# Altium PCB PCB.PcbDoc
Units mil, origin at the board's own origin, x right, y up, seen from the top; angles counter-clockwise.
Board outline 7940 x 2960 mil, 2 copper layers (Top Layer, Bottom Layer); 79 components, 65 nets, 256 pads, 2 vias.
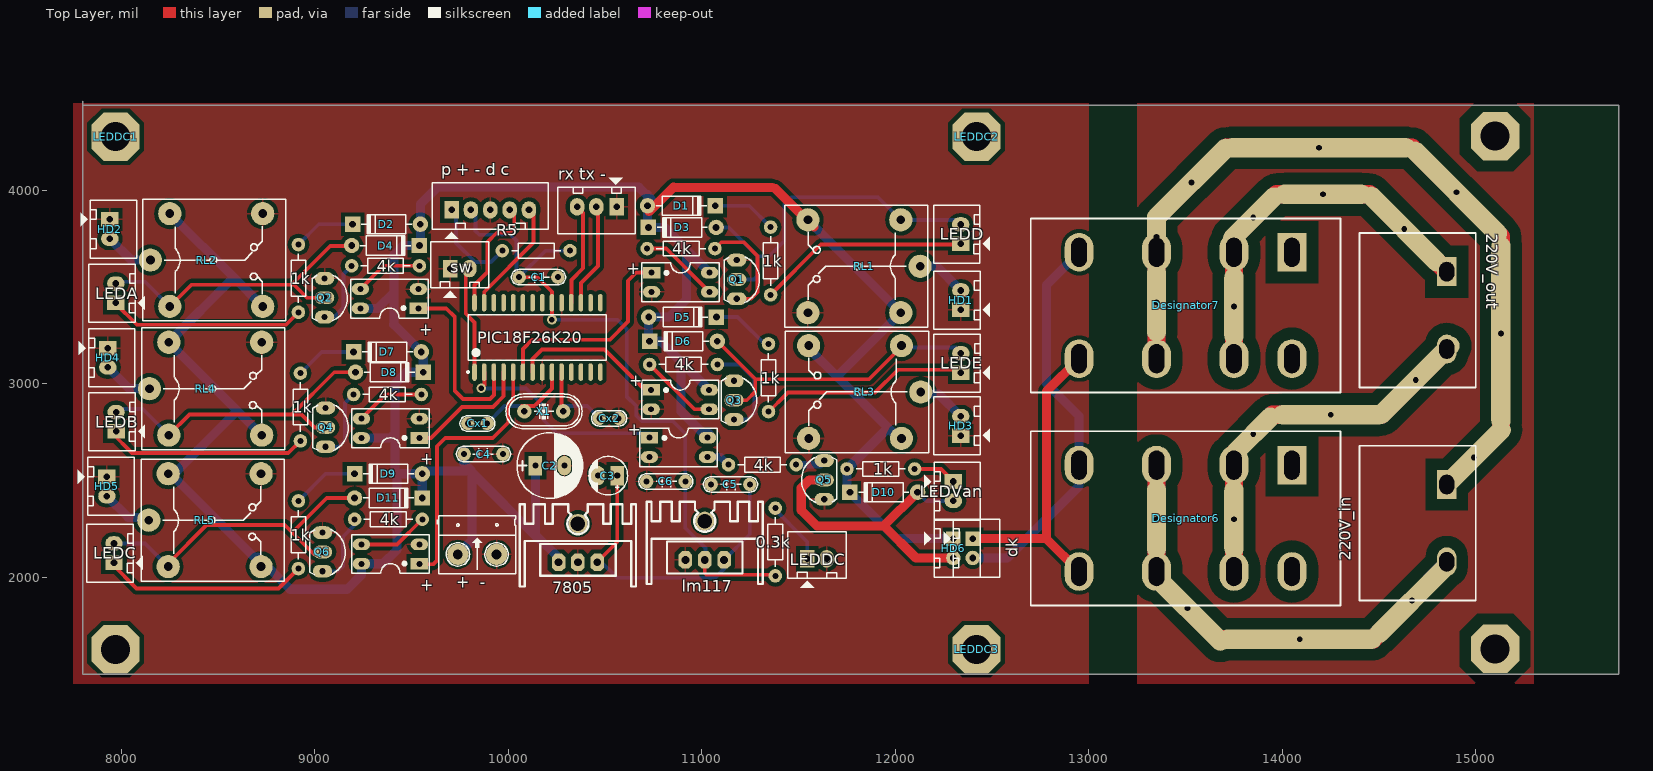
[diagram p0: Top Layer view]
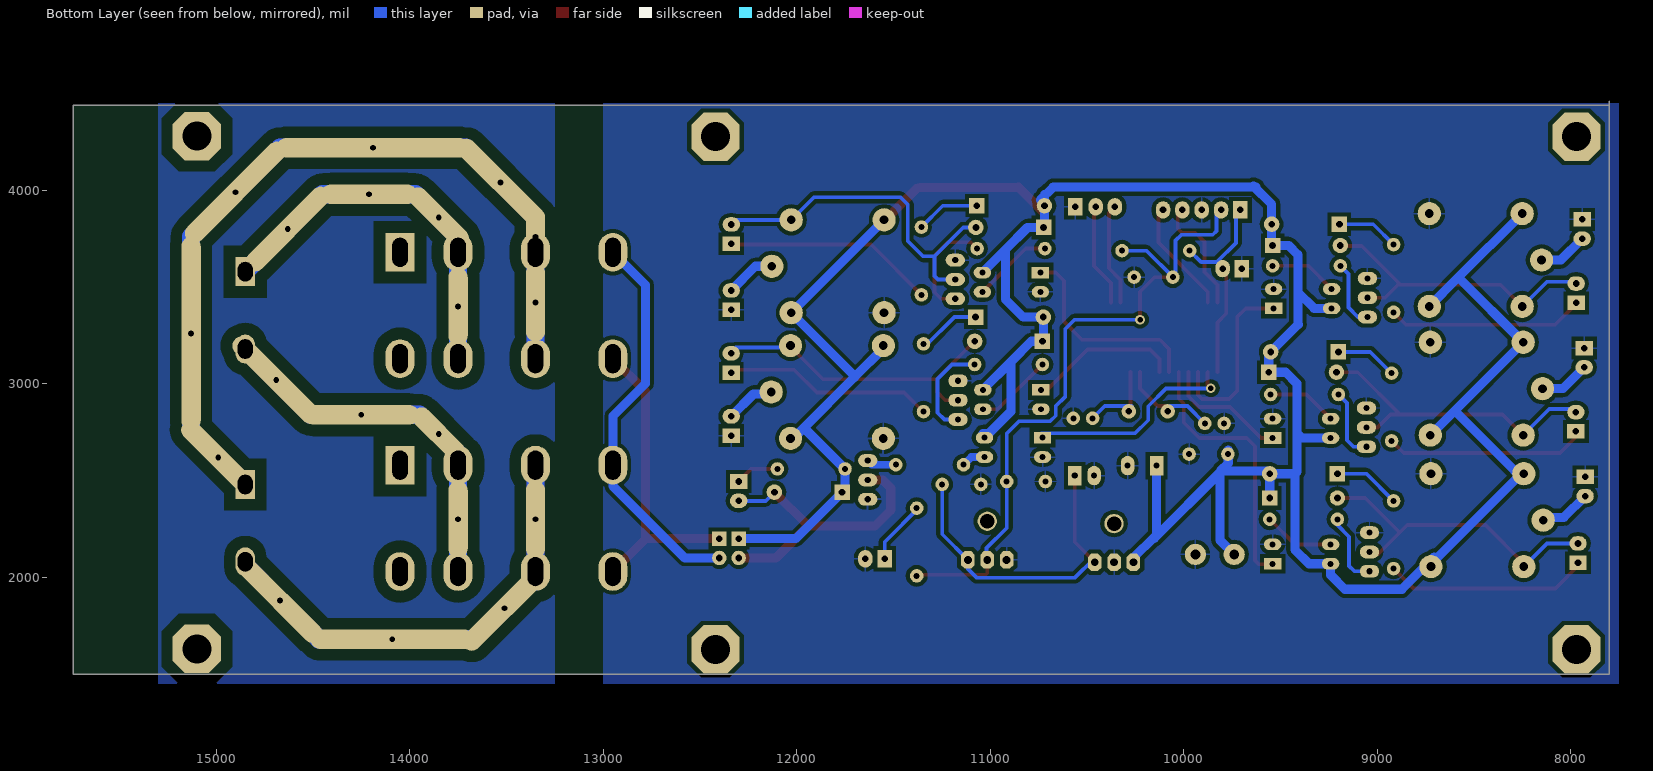
[diagram p1: Bottom Layer view, seen from below]
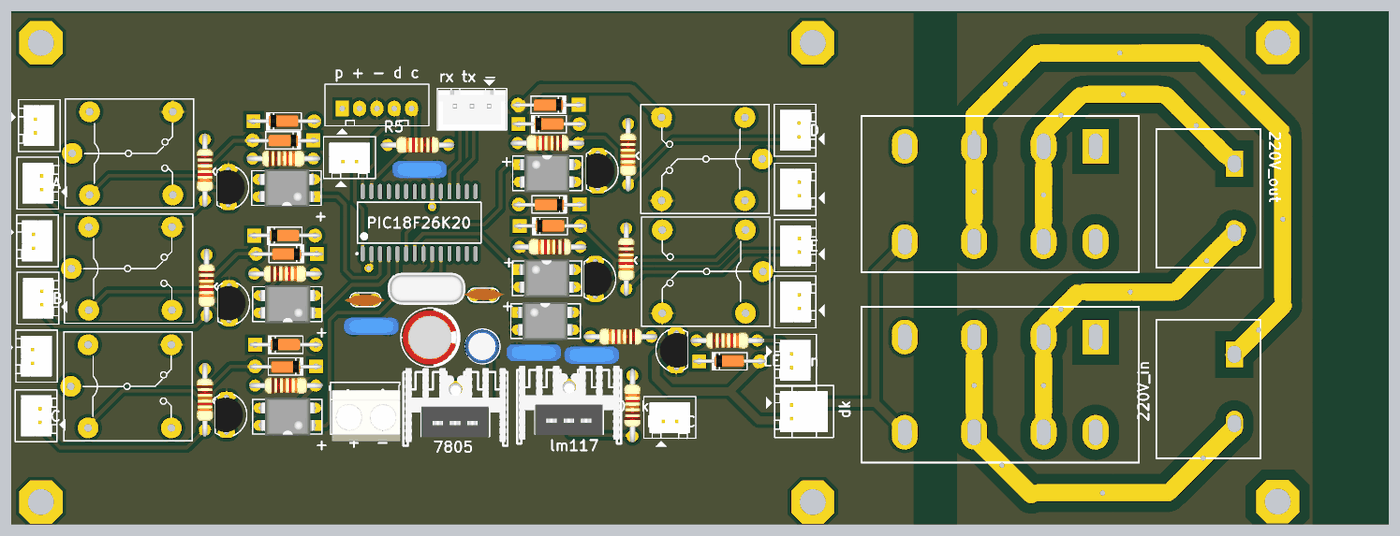
[diagram p2: 3D render of the assembled board from above, using the file's embedded part models]

## Layer stack, top to bottom
Top Layer: signal copper 1.4
Dielectric: dielectric 12.6, FR-4, Dk 4.8
Bottom Layer: signal copper 1.4

## Board outline
7800,4460 7800,1500 15740,1500 15740,4440 7800,4440

## Design rules (kind name [scope] priority, off if disabled: settings)
Clearance [All] p1: gap=60
PolygonConnect [All] p1: connectstyle=Relief reliefconductorwidth=10 reliefentries=4 polygonreliefangle="90 Angle"
RoutingVias [All] p1: holewidth=28 width=50 viastyle="Through Hole" minholewidth=28 minwidth=50 maxholewidth=28 maxwidth=50
SilkscreenOverComponentPads [All] p1: minsilkscreentomaskgap=10
SolderMaskExpansion [All] p1: expansion=4
Width 220V [(InNet('24') OR InNet('25') OR InNet('26') OR InNet('27') OR InNet('28') OR InNet('29') OR InNet('30') OR InNet('31') OR InNet('32'))] p1: maxlimit=94 minlimit=94 preferedwidth=94
Width power [(InNet('12V') OR InNet('NetHD1_2') OR InNet('NetHD2_2') OR InNet('NetHD3_2') OR InNet('NetHD4_2') OR InNet('NetHD5_2') OR InNet('33') OR InNet('34'))] p2: maxlimit=47.24 minlimit=47.24 preferedwidth=47.24
Width "all net" [All] p3: maxlimit=59.06 minlimit=19.68 preferedwidth=19.68
27 further rules are at their usual default settings.

## Components (designator, comment, footprint, x,y, rotation, side; value= is the part's Value field where it differs from the comment)
0.3k "1k" R1/4W 11379.53,2357.52 r270 top (schematic designator R14)
1k "1k" R1/4W 11355,3460 r90 top (schematic designator R3)
1k "1k" R1/4W 8915,3370 r90 top (schematic designator R4)
1k "1k" R1/4W 11344.33,2856.46 r90 top (schematic designator R8)
1k "1k" R1/4W 8925,2705 r90 top (schematic designator R9)
1k "1k" R1/4W 12100,2560 r180 top (schematic designator R12)
1k "1k" R1/4W 8915,2045 r90 top (schematic designator R13)
4k "4.7k" R1/4W 10717.36,3698.98 r0 top (schematic designator R1)
4k "4.7k" R1/4W 9540,3610 r180 top (schematic designator R2)
4k "4.7k" R1/4W 10730,3100 r0 top (schematic designator R6)
4k "4.7k" R1/4W 9550,2945 r180 top (schematic designator R7)
4k "4.7k" R1/4W 11137.64,2581.85 r0 top (schematic designator R10)
4k "4.7k" R1/4W 9555,2300 r180 top (schematic designator R11)
220V_in "Comment" connec2 14850,2480 r270 top
220V_out "Comment" connec2 14850,3580 r270 top
7805 "7805" QTO-220H3 10259.53,2077.52 r0 top (schematic designator J2)
+ "PC817" DIP4/W0.3 10740,3574.96 r270 top (schematic designator U1)
+ "PC817" DIP4/W0.3 9535,3390 r90 top (schematic designator U2)
+ "PC817" DIP4/W0.3 10738.03,2968.66 r270 top (schematic designator U4)
+ "PC817" DIP4/W0.3 9540,2720 r90 top (schematic designator U5)
+ "PC817" DIP4/W0.3 10729.17,2721.61 r270 top (schematic designator U6)
+ "PC817" DIP4/W0.3 9540,2070 r90 top (schematic designator U7)
"+  -" "Jac DC" HED2 9739.02,2118.27 r0 top (schematic designator JDC1)
C1 "104" CN2 10255.75,3551.34 r180 top
C2 "100uF/35V" CP1.5/3.4 10139.53,2577.52 r0 top
C3 "10uF" CP1/2 10562.83,2525.75 r180 top
C4 "104" CN2 9771.5,2636.97 r0 top
C5 "104" CN2 11247.87,2480.47 r180 top
C6 "104" CN2 10914.21,2495.24 r180 top
Cx1 "33pF" CN1 9890.59,2795.43 r180 top
Cx2 "33pF" CN1 10470.32,2822.01 r0 top
D1 "1N4007" D1A 10719.33,3920.43 r180 top
D2 "1N4007" D1A 9545,3825 r0 top
D3 "1N4007" D1A 11073.66,3808.23 r0 top
D4 "1N4007" D1A 9190,3715 r180 top
D5 "1N4007" D1A 10725,3345 r180 top
D6 "1N4007" D1A 11080,3220 r0 top
D7 "1N4007" D1A 9550,3165 r0 top
D8 "1N4007" D1A 9210,3060 r180 top
D9 "1N4007" D1A 9555,2535 r0 top
D10 "1N4007" D1A 12115,2440 r0 top
D11 "1N4007" D1A 9205,2410 r180 top
Designator6 "Comment" DIP8 14050,2580 r270 top
Designator7 "Comment" DIP8 14050,3680 r270 top
dk "Comment" CON2#1 12400,2200 r270 top
HD1 "Header 2" CON2#2 12338.11,3382.56 r90 top
HD2 "Header 2" CON2#2 7940,3850 r270 top
HD3 "Header 2" CON2#2 12338.11,2732.56 r90 top
HD4 "Header 2" CON2#2 7930,3185 r270 top
HD5 "Header 2" CON2#2 7925,2520 r270 top
HD6 "Header 2" CON2#1 12300,2200 r270 top
LEDA "LED" CON2#2 7971.3,3418.46 r90 top (schematic designator LED2)
LEDB "LED" CON2#2 7972.28,2754.09 r90 top (schematic designator LED4)
LEDC "LED" CON2#2 7961.46,2074.96 r90 top (schematic designator LED6)
LEDD "LED" CON2#2 12337.44,3723.58 r90 top (schematic designator LED1)
LEDDC "LED" CON2#2 11545.12,2095.63 r0 top (schematic designator LED7)
LEDDC1 "LED" VIT 7969.53,4277.52 r0 top (schematic designator LED7)
LEDDC2 "LED" VIT 12419.53,4277.52 r0 top (schematic designator LED7)
LEDDC3 "LED" VIT 12419.53,1627.52 r0 top (schematic designator LED7)
LEDE "LED" CON2#2 12338.43,3057.24 r90 top (schematic designator LED3)
LEDVan "LED" CON2#2 12300.04,2495.24 r270 top (schematic designator LED5)
lm117 "LM117" QTO-220H3 10915,2090 r0 top (schematic designator J3)
"p + - d c" "ICSD" CON5 9706.54,3898.78 r0 top (schematic designator *1)
PIC18F26K20 "PIC18F26K20-I/SO" SOIC-SO28_N 10150,3240 r90 top (schematic designator U3)
Q1 "C1815" QTO-92 11179.96,3539.53 r270 top
Q2 "C1815" QTO-92 9050,3445 r270 top
Q3 "C1815" QTO-92 11166.18,2915.51 r270 top
Q4 "C1815" QTO-92 9055,2775 r270 top
Q5 "C1815" QTO-92 11632.72,2503.11 r90 top
Q6 "C1815" QTO-92 9039.21,2131.06 r270 top
R5 "1k" R1/4W 9968.35,3688.15 r0 top
RL1 "Relay 10A/12V" RL_SPDT_10A 12128.11,3607.56 r180 top
RL2 "Relay 10A/12V" RL_SPDT_10A 8150,3640 r0 top
RL3 "Relay 10A/12V" RL_SPDT_10A 12131.73,2957.83 r180 top
RL4 "Relay 10A/12V" RL_SPDT_10A 8145,2975 r0 top
RL5 "Relay 10A/12V" RL_SPDT_10A 8141.57,2295.43 r0 top
"rx tx -" "UART" CON3 10555,3915 r180 top (schematic designator J1)
sw "SW" CON2#2 9698.66,3595.63 r0 top (schematic designator SW1)
X1 "4Mhz" XT2 10182.91,2857.52 r180 top

## Footprints (in the part's own frame and the unit in brackets; to place one, negate y for a bottom-side part, rotate by r counter-clockwise, add the part's x,y. Pads: shape width x height; smd on the part's side, far side on the other; paste and mask are expansions set on the pad)
CN1 [mil]
  round 70 hole 31: 1(0,0) 2(100,0)
  silkscreen extent -40,-40 141,40, body extent -60,-30 170,37, height 265
CN2 [mil]
  round 70 hole 31: 1(0,0) 2(200,0)
  silkscreen extent -40,-40 240,40, body extent -54,-44 260,55, height 407
CON2#1 [mil] "CON2"
  rect 75x75 hole 34: 1(0,0)
  round 75 hole 34: 2(100,0)
  silkscreen extent -100,-150 200,140, body extent -68,-70 168,107, height 236
CON2#2 [mil] "CON2"
  rect 75x90 hole 34: 1(0,0)
  oval 75x90 hole 34: 2(100,0)
  silkscreen extent -100,-150 200,140, body extent -68,-70 168,107, height 236
CON3 [mil] "CON 3"
  rect 75x90 hole 34: 1(-5,0)
  oval 75x90 hole 34: 2(100,0) 3(200,0)
  silkscreen extent -100,-150 300,140, body extent -95,-90 295,136, height 276
CON5 [mil] "CON5"
  rect 75x90 hole 34: 1(0,0)
  oval 75x90 hole 34: 2(100,0) 3(200,0) 4(300,0) 5(400,0)
  silkscreen extent -100,-150 500,140
connec2 [mil] "connec2"
  rect 150x100 hole 80 slot 100 at 0 deg: 1(0,0)
  oval 150x100 hole 80 slot 100 at 0 deg: 2(400,0)
  silkscreen extent -200,-450 600,150
CP1.5/3.4 [mil] "Tu hoa 220->470uF,16V, 470uF/16V,25V"
  rect 70x100 hole 32: 1(0,0)
  oval 70x100 hole 32: 2(150,0)
  silkscreen extent -95,-170 245,170, body extent -85,-157 230,157, height 446
CP1/2 [mil] "Tu hoa < 22uF/16>50V"
  rect 70x100 hole 32: 1(0,0)
  oval 70x100 hole 32: 2(100,0)
  silkscreen extent -53,-100 147,100, body extent -49,-99 149,99, height 287
D1A [mil] "Diode 1A, W 100mil, L 350mil"
  round 80 hole 35: 1(0,0)
  rect 80x80 hole 35: 2(-350,0)
  silkscreen extent -305,-50 -45,50, body extent -386,-33 34,36, height 84
DIP4/W0.3 [mil] "4 PIN, W 300mil, Pin to pin 100mil"
  rect 60x90 hole 31: 1(0,0)
  oval 60x90 hole 31: 2(100,0) 3(100,300) 4(0,300)
  silkscreen extent -50,-50 150,350, body extent -59,-10 159,305, height 170
DIP8 [mil] "relay 12v"
  rect 200x150 hole 80 slot 150 at 0 deg: 1(0,0)
  oval 200x150 hole 80 slot 150 at 0 deg: 4(550,0) 5(0,-300) 8(550,-300) 9(0,-700) 12(550,-700) 13(0,-1100) 14(550,-1100)
  silkscreen extent -175,-1350 725,250
HED2 [mil] "Header 2, 2 pin, hight 300mil, Pin to Pin 200, Colour Green"
  round 110 hole 50: 1(0,0) 2(200,0)
  silkscreen extent -106,-100 300,200, body extent -92,-140 302,155, height 394
QTO-92 [mil] "TO-92"
  oval 66x100 hole 32: 1(-100,0) 2(0,0) 3(100,0)
  silkscreen extent -117,-65 120,118, body extent -109,-66 109,95, height 245
QTO-220H3 [mil] "TO-220 1-2-3"
  oct 70x90 hole 40: 1(0,0) 2(100,0) 3(200,0)
  round 100 hole 75: 4(100,200)
  silkscreen extent -200,-125 400,300, body extent -190,-102 392,323, height 984
R1/4W [mil] "R 1/4W, 2 Pin, 350mil"
  round 70 hole 31: 1(0,0) 2(350,0)
  silkscreen extent 48,-38 302,38, body extent -40,-47 386,47, height 111
RL_SPDT_10A [mil] "Relay SPDT, 5 pin, 10A,W 650mil, L 800mil, H 800mil"
  round 120 hole 45: 1(0,0) 2(580,240) 3(580,-240) 4(100,-240) 5(100,240)
  silkscreen extent -40,-315 700,315
SOIC-SO28_N [mm] "SOIC, 28-Leads, Body 17.9x7.5mm, Pitch 1.27mm, IPC Medium Density"
  oval 2.3x0.6 smd: 1(-4.55,8.255) 2(-4.55,6.985) 3(-4.55,5.715) 4(-4.55,4.445) 5(-4.55,3.175) 6(-4.55,1.905) 7(-4.55,0.635) 8(-4.55,-0.635) 9(-4.55,-1.905) 10(-4.55,-3.175) 11(-4.55,-4.445) 12(-4.55,-5.715) 13(-4.55,-6.985) 14(-4.55,-8.255) 15(4.55,-8.255) 16(4.55,-6.985) 17(4.55,-5.715) 18(4.55,-4.445) 19(4.55,-3.175) 20(4.55,-1.905) 21(4.55,-0.635) 22(4.55,0.635) 23(4.55,1.905) 24(4.55,3.175) 25(4.55,4.445) 26(4.55,5.715) 27(4.55,6.985) 28(4.55,8.255)
  silkscreen extent -4.67,-9.05 3,9.23, body extent -3.8,-9.06 3.8,9.06, height 2.65
VIT [mil] "VIT"
  oct 250x250 hole 150: VIT1(0,0)
XT2 [mil] "Footpin for Crystal 2 pin"
  round 75 hole 34: 1(-100,0) 2(100,0)
  silkscreen extent -198,-90 195,90, body extent -233,-93 213,90, height 138

## Part data
0.3k 1k 1k 1k 1k 1k 1k 4k 4k 4k 4k 4k 4k R5: library part R1/4W, "Resistor 1/4W"
7805 lm117 "rx tx -": library part JP3, "Jumper 3"
+ + + + + +: "Single Opto"
"+  -": library part DCIN, "Jac DC input"
C1 C4 C5 C6: library part CN2, "Cap np 104 => 105pF"
C2: library part CP3, "Cap 100uF/35V - 470uF/16V"
C3: library part CP1, "Cap P  0,1uF < 22uF , 16 - 50V"
Cx1 Cx2: library part CN0, "Cremic For Xtal 1pF => 100pF"
D1 D2 D3 D4 D5 D6 D7 D8 D9 D10 D11: library part D1A, "Diode 1A"
HD1 HD2 HD3 HD4 HD5 HD6: library part Hed2, "Header 2 (Green)"
LEDA LEDB LEDC LEDD LEDDC LEDDC1 LEDDC2 LEDDC3 LEDE LEDVan: "LED Single colour Green and Red"
"p + - d c": library part JP5
PIC18F26K20: "Flash Microcontroller with 10-Bit A/D and nanoWatt Technology, 64K Flash, 28-Pin SOIC, Industrial Temperature Range"
Q1 Q2 Q3 Q4 Q5 Q6: "NPN 600mW, ECB"
RL1 RL2 RL3 RL4 RL5: library part "Relay 1", "Relay SPDT,10A - 12VDC 5 Pin"
sw: library part SW2, "Switch button 2 pin"
X1: library part XT2, "Crystal For all Crystal 2pin."

## Free pads (board coordinates)
  oval 100x400 hole 30: 0(13350,2300) 6(13350,3420) 7(13750,2300) 8(13750,3400)
  oval 500x100 hole 30: 9(14210,3980)
  oval 100x400 hole 30 rot 135: 11(13850,3860)
  oval 100x580 hole 30 rot 45: 12(14630,3800) 14(13510,1840)
  oval 850x100 hole 30: 13(14090,1680)
  oval 100x580 hole 30 rot 135: 15(14670,1880)
  oval 100x600 hole 30 rot 135: 19(14690,3020) 24(13530,4040)
  oval 600x100 hole 30: 20(14250,2840)
  oval 100x300 hole 30: 23(13350,3760)
  oval 1000x100 hole 30: 25(14190,4220)
  oval 100x700 hole 30 rot 45: 26(14900,3990)
  oval 100x1000 hole 30: 27(15130,3260)
  oval 100x500 hole 30 rot 135: 28(14990,2620)
  oval 100x350 hole 30 rot 135: 29(13850,2740)
  oct 250x250 hole 150: VIT2(15100,4280)
  oct 250x250 hole 149.61: VIT3(15100,1630) VIT4(7969.53,1627.52)

## Via types
v1: diameter 50, hole 28, Top Layer to Bottom Layer, 2 vias

## Nets (pads, with @x,y where several pads share a name; then routed paths per layer and width w, separated by ;. In a path a pad name is that pad's centre, name@x,y a point inside that pad or via, vN(x,y) a via of type N, cw(c..) or ccw(c..) an arc to the next point about the centre after c; other vN are vias at no path point)
3.3V: 0.3k.2 "p + - d c.2" C1.2 C6.1 lm117.2 PIC18F26K20.20 R5.2 | length 3458.6
  Top Layer w19.68: C1.2 10149.45,3551.34 10225,3475.79 PIC18F26K20.20 v1(10225,3331.61) ; lm117.2 11015,2021.42 11023.07,2013.35 0.3k.2@11365,2013.35
  Bottom Layer w19.68: 9830,3870 9830,3790.08 9849.25,3770.83 10011.65,3770.83 10041.18,3741.3 10041.18,3565.91 C1.2 10192.56,3688.15 R5.2 ; v1(10225,3331.61) 10564.8,3331.61 10611.3,3285.12 10611.3,2934.96 10661.26,2885 10661.26,2834.8 10689.8,2806.26 10851.22,2806.26 10914.21,2743.27 C6.1 10914.21,2255.08 11018.54,2150.75 11018.54,2093.54 lm117.2
12V: 1k.2@11750,2560 7805.1 "+  -.1" +.4 C2.1 C4.1 D1.1 D2.1 D3.2 D4.2 D5.1 D6.2 D7.1 D8.2 D9.1 D10.2 D11.2 HD6.1 RL1.3 RL1.5 RL2.3 RL2.5 RL3.3 RL3.5 RL4.3 RL4.5 RL5.3 RL5.5 | length 15750.3
  Top Layer w47.24: D1.1@10727.2,3890.91 10853.19,4016.89 ; 10860.08,4014.92 11364.02,4014.92 ; 11380.75,4009.02 RL1.3@11579.61,3810.16
  Bottom Layer w47.24: RL4.5@8211.26,3218.66 RL4.5@8248.66,3218.66 ; RL5.5 RL5.5@8254.57,2535.43 ; RL2.5 8585.02,3544.98 ; RL5.3@8704.61,2105.43 8871.89,1938.15 ; RL5.3@8720,2070 RL5.5@8254.57,2535.43 ; RL4.3 8599.61,2860.39 ; RL2.3 8585.02,3544.98 ; 8881.38,1938.15 9166.18,1938.15 9240,2011.97 9240,2070 9352.17,2070 9425,2142.83 9425,2535 ; +.4@9235,3390 9325,3390 9409.29,3474.29 ; +.4@9240,2720 9390.94,2720 9414.21,2743.27 ; D11.2 D9.1 ; 9625.83,4016.89 10661.26,4016.89 ; 9639.11,4022.3 9545,3928.19 D2.1 9545,3720 D4.2 9456.81,3715 9409.29,3667.48 9409.29,3474.29 ; 9739.02,2118.27 9812.2,2191.46 9812.2,2541.85 10152.09,2201.97 ; C4.1@9769.53,2656.65 9769.53,2590.47 9810,2550 9570,2550 D9.1 ; C2.1@10139.53,2581.85 10139.53,2220.47 7805.1@10270,2090 ; 10674.06,4016.89 D1.1@10740,3950.94 ; 10719.33,3977.52 D1.1 10719.33,3812.56 D3.2 10806.73,3808.23 10921,3693.96 ; +.4@11036.06,2744.25 11005.75,2744.25 10892.36,2857.64 10892.36,3114.33 ; +.4@11038.03,2968.66 10892.36,3114.33 ; +.4@11040,3574.96 10921,3693.96 ; RL3.3@11548.11,3187.56 11702.6,3033.07 ; RL1.3 RL1.5 11702.6,3042.05 11702.6,3033.07 ; RL3.5@12028.11,2707.56 11963.86,2771.81 ; HD6.1 12005,2200 D10.2 11750,2455 11750,2560 11961.81,2771.81 11963.86,2771.81 ; RL4.5@8248.66,3218.66 RL4.5 8599.61,2860.39 ; RL4.5@8248.66,3218.66 8574.98,3544.98 8585.02,3544.98 ; RL5.5@8254.57,2535.43 8240,2550 RL5.5@8289.21,2550 ; RL5.5@8254.57,2535.43 8274.65,2535.43 RL5.5@8289.21,2550 ; RL5.5@8289.21,2550 8599.61,2860.39 ; 9409.29,3474.29 9409.29,3308.78 9407.76,3307.24 D7.1 9560,3155 D8.2 9473.07,3060 9414.21,3001.14 9414.21,2743.27 ; 9414.21,2743.27 9414.21,2545.79 9425,2535 ; 9425,2535 D9.1 ; 10892.36,3114.33 10786.69,3220 D6.2 10725,3225 D5.1 10828.94,3345 10921,3437.07 10921,3693.96 ; 11702.6,3033.07 11963.86,2771.81
24: 220V_out.2 Designator6.5 Designator6.8 pad.7 pad.19 pad.20 pad.29 | length 3867.4
  Top Layer w94: Designator6.8 pad.7 Designator6.5 13750,2640 pad.29 13950,2840 pad.20 14510,2840 pad.19 220V_out.2
  Bottom Layer w94: Designator6.8 pad.7 Designator6.5 13750,2640 pad.29 13950,2840 pad.20 14510,2840 pad.19 220V_out.2
25: 220V_out.1 Designator7.5 Designator7.8 pad.8 pad.9 pad.11 pad.12 | length 3973.6
  Top Layer w94: Designator7.8 pad.8 Designator7.5 13750,3760 pad.11 13970,3980 pad.9 14450,3980 pad.12 220V_out.1
  Bottom Layer w94: Designator7.8 pad.8 Designator7.5 13750,3760 pad.11 13970,3980 pad.9 14450,3980 pad.12 220V_out.1
26: 220V_in.2 Designator6.9 Designator6.12 pad.0 pad.13 pad.14 pad.15 | length 4799.9
  Top Layer w94: Designator6.9 pad.0 Designator6.12 13350,2000 pad.14 13670,1680 pad.13 14470,1680 pad.15 14850,2060 220V_in.2
  Bottom Layer w94: pad.14@13350,1980 pad.14@13350,2000 ; Designator6.9 pad.0 Designator6.12 pad.14@13350,2000 ; 220V_in.2 14850,2060 pad.15 14470,1680 pad.13 13670,1680 pad.14 pad.14@13350,2000
27: 220V_in.1 Designator7.9 Designator7.12 pad.6 pad.23 pad.24 pad.25 pad.26 pad.27 pad.28 | length 8491.3
  Top Layer w94: Designator7.12 pad.6 Designator7.9 pad.23 13350,3860 pad.24 13710,4220 pad.25 14670,4220 pad.26 15130,3760 pad.27 15130,2760 pad.28 220V_in.1
  Bottom Layer w94: Designator7.12 pad.6 Designator7.9 pad.23 13350,3860 pad.24 13710,4220 pad.25 14670,4220 pad.26 15130,3760 pad.27 15130,2760 pad.28 220V_in.1
28: 
29: 
30: 
31: 
32: 
33: Designator6.14 Designator7.14 dk.1 | length 1621.1
  Top Layer w47.24: dk.1 12780,2200 12780.47,2199.53 ; Designator6.14 12780.47,2199.53 ; Designator7.14 12780.47,2960.47 12780.47,2199.53
34: Designator6.13 Designator7.13 dk.2 | length 2052.5
  Bottom Layer w47.24: dk.2 12577.99,2100 12950,2472.01 Designator6.13 12950,2832.95 12780.47,3002.48 12780.47,3510.47 Designator7.13
35: 
36: 
GND: 7805.2 "+  -.2" "p + - d c.3" "rx tx -.1" +.2 C1.1 C2.2 C3.2 C4.2 C5.2 C6.2 Cx1.2 Cx2.2 HD1.1 HD2.1 HD3.1 HD4.1 HD5.1 LEDDC.2 lm117.1 PIC18F26K20.8 PIC18F26K20.19 Q1.1 Q2.1 Q3.1 Q4.1 Q5.1 Q6.1 RL1.2 RL2.2 RL3.2 RL4.2 RL5.2 sw.1
MOTO: +.1@10729.17,2721.61 PIC18F26K20.2 | length 1067.1
  Top Layer w19.68: PIC18F26K20.2 9875.83,3060.04 v1@9875.83,2992.28
  Bottom Layer w19.68: v1@9875.83,2975.55 10091.38,2975.55 10182.91,2884.02 10182.91,2812.17 10250.83,2744.25 +.1@10736.06,2744.25
  other v1: 9859.53,2977.52
NetC3_1: 7805.3 C3.1 C5.1 lm117.3 | length 1668.6
  Top Layer w19.68: 7805.3@10470,2090 10562.83,2182.83 C3.1
  Bottom Layer w19.68: 7805.3@10470,2090 10561.81,1998.19 11070.71,1998.19 11115,2042.48 lm117.3 11247.87,2222.87 C5.1
NetD1_2: 1k.2@11355,3810 D1.2 | length 331.4
  Bottom Layer w19.68: D1.2 11244.57,3920.43 1k.2@11355,3810
NetD2_2: 1k.2@8915,3720 D2.2 | length 323.5
  Bottom Layer w19.68: 1k.2@8915,3720 9020,3825 D2.2
NetD5_2: 1k.2@11344.33,3206.46 D5.2 | length 322.1
  Bottom Layer w19.68: D5.2 11185,3345 1k.2@11335,3195
NetD7_2: 1k.2@8925,3055 D7.2 | length 320.6
  Bottom Layer w19.68: 1k.2@8925,3055 9035,3165 D7.2
NetD9_2: 1k.2@8915,2395 D9.2 | length 348
  Bottom Layer w19.68: 1k.2@8915,2395 9055,2535 D9.2
NetHD1_2: HD1.2 RL1.1 | length 261.8
  Bottom Layer w47.24: RL1.1 12213.11,3607.56 HD1.2
NetHD2_2: HD2.2 RL2.1 | length 255.6
  Bottom Layer w47.24: HD2.2 8050,3640 RL2.1
NetHD3_2: HD3.2 RL3.1 | length 257.6
  Bottom Layer w47.24: RL3.1@12128.11,2947.56 12223.11,2947.56 HD3.2
NetHD4_2: HD4.2 RL4.1 | length 260.6
  Bottom Layer w47.24: HD4.2 8040,2975 RL4.1
NetHD5_2: HD5.2 RL5.1 | length 260.6
  Bottom Layer w47.24: HD5.2 8035,2310 RL5.1@8140,2310
NetLED1_1: 1k.1@11355,3460 LEDD.1 | length 1080.2
  Top Layer w19.68: 1k.1@11355,3460 11614.76,3719.76 LEDD.1@12327.6,3719.76
NetLED2_1: 1k.1@8915,3370 LEDA.1 | length 1021
  Top Layer w19.68: LEDA.1@7967.36,3417.6 8079.69,3305.28 8850.28,3305.28 1k.1@8915,3370
NetLED3_1: 1k.1@11344.33,2856.46 LEDE.1 | length 1077.4
  Top Layer w19.68: 1k.1@11335,2845 11444.88,2954.88 11895.51,2954.88 12013.19,3072.56 LEDE.1@12318.11,3072.56
NetLED4_1: 1k.1@8925,2705 LEDB.1 | length 1057.8
  Top Layer w19.68: LEDB.1@7950,2760 7950,2746.85 8054.96,2641.89 8861.89,2641.89 1k.1@8925,2705
NetLED5_1: 1k.1@12100,2560 LEDVan.1 | length 226.9
  Top Layer w19.68: 1k.1@12100,2560 12235.28,2560 LEDVan.1
NetLED6_1: 1k.1@8915,2045 LEDC.1 | length 1057.3
  Top Layer w19.68: LEDC.1@7952.6,2068.19 8078.7,1942.09 8812.09,1942.09 1k.1@8915,2045
NetLED7_1: 0.3k.1 LEDDC.1 | length 342.3
  Bottom Layer w19.68: 0.3k.1@11365,2363.35 11545.12,2183.23 LEDDC.1
NetQ1_3: 4k.2@11067.36,3698.98 Q1.3 | length 573.1
  Top Layer w19.68: 4k.2@11067.36,3698.98 11099.84,3731.46 11217.36,3731.46 11288.23,3660.59 11288.23,3473.58 11254.17,3439.53 Q1.3
NetQ2_3: 4k.2@9190,3610 Q2.3 | length 352
  Bottom Layer w19.68: Q2.3 9099.61,3345 9148.46,3393.86 9148.46,3568.46 4k.2@9190,3610
NetQ3_3: 4k.2@11080,3100 Q3.3 | length 517.3
  Bottom Layer w19.68: 4k.2@11080,3100 11197.24,3100 11271.5,3025.75 11271.5,2850.55 11236.46,2815.51 Q3.3
NetQ4_3: 4k.2@9200,2945 Q4.3 | length 369.6
  Bottom Layer w19.68: Q4.3 9122.52,2675 9156.34,2708.82 9156.34,2901.34 4k.2@9200,2945
NetQ5_3: 4k.2@11487.64,2581.85 Q5.3 | length 153.9
  Bottom Layer w39.37: 4k.2@11487.64,2581.85 11611.46,2581.85 Q5.3
NetQ6_3: 4k.2@9205,2300 Q6.3 | length 382.8
  Bottom Layer w19.68: Q6.3 9116.38,2031.06 9144.53,2059.21 9144.53,2209.8 9205,2270.28 4k.2@9205,2300
NetR1_1: 4k.1@10717.36,3698.98 +.3@11040,3474.96 | length 415.4
  Top Layer w19.68: 4k.1@10717.36,3698.98 10815.98,3698.98 +.3@11040,3474.96
NetR2_1: 4k.1@9540,3610 +.3@9235,3490 | length 354.7
  Top Layer w19.68: +.3@9235,3490 9355,3610 4k.1@9540,3610
NetR6_1: 4k.1@10730,3100 +.3@11038.03,2868.66 | length 403.9
  Top Layer w19.68: 4k.1@10730,3100 10961.34,2868.66 +.3@11038.03,2868.66
NetR7_1: 4k.1@9550,2945 +.3@9240,2820 | length 361.8
  Top Layer w19.68: +.3@9240,2820 9365,2945 4k.1@9550,2945
NetR10_1: 4k.1@11137.64,2581.85 +.3@11029.17,2621.61 | length 124.9
  Bottom Layer w39.37: +.3@11029.17,2621.61 11097.87,2621.61 4k.1@11137.64,2581.85
NetR11_1: 4k.1@9555,2300 +.3@9240,2170 | length 368.8
  Top Layer w19.68: +.3@9240,2170 9425,2170 4k.1@9555,2300
OSC1: Cx1.1 PIC18F26K20.9 X1.2 | length 494.5
  Top Layer w19.68: X1.2@10070,2885 10134.69,2885 10225,2975.31 PIC18F26K20.9
  Bottom Layer w19.68: Cx1.1 9980.16,2885 X1.2@10070,2885
OSC2: Cx2.1 PIC18F26K20.10 X1.1 | length 404.3
  Top Layer w19.68: X1.1@10270,2885 10275,2890 PIC18F26K20.10
  Bottom Layer w19.68: X1.1@10270,2885 10407.32,2885 Cx2.1
PGC: "p + - d c.5" PIC18F26K20.27 | length 556.5
  Top Layer w19.68: PIC18F26K20.27 9875,3474.72 10130,3729.72 10130,3870
PGD: "p + - d c.4" PIC18F26K20.28 | length 576.1
  Top Layer w19.68: PIC18F26K20.28 9825,3510.35 9892.56,3577.91 9892.56,3733.43 9939.8,3780.67 10008.7,3780.67 10030,3801.97 10030,3870
QA: D4.1 LEDA.2 Q2.2 RL2.4 | length 1604.9
  Top Layer w19.68: RL2.4 8361.97,3511.97 8878.78,3511.97 ; Q2.2 8958.54,3445 8891.57,3511.97 8878.78,3511.97 ; D4.1 9187.76,3712.76 9079.57,3712.76 8878.78,3511.97
  Bottom Layer w19.68: LEDA.2@7967.36,3527.6 8122.4,3527.6 RL2.4
QB: D8.1 LEDB.2 Q4.2 RL4.4 | length 1651.4
  Top Layer w19.68: RL4.4 8351.69,2841.69 8881.73,2841.69 ; Q4.2 8997.64,2775 8930.94,2841.69 8881.73,2841.69 ; D8.1 9100.04,3060 8881.73,2841.69
  Bottom Layer w19.68: LEDB.2@7950,2870 8110,2870 RL4.4
QC: D11.1 LEDC.2 Q6.2 RL5.4 | length 1694.9
  Top Layer w19.68: RL5.4@8240,2070 8439.84,2269.84 8844.33,2269.84 8886.65,2227.52 ; Q6.2@9060,2125 8998.7,2125 8993.94,2120.24 8886.65,2227.52 ; D11.1 9061.26,2410 8886.65,2235.39 8886.65,2227.52
  Bottom Layer w19.68: LEDC.2 8122.05,2174.96 RL5.4
QD: D3.1 LEDD.2 Q1.2 RL1.4 | length 1825.5
  Bottom Layer w19.68: D3.1 11138.62,3808.23 11287.24,3659.61 ; Q1.2 11269.53,3539.53 11287.24,3557.24 11287.24,3659.61 ; LEDD.2@12327.6,3829.76 12309.8,3847.56 RL1.4 11910.94,3964.72 11463.43,3964.72 11426.02,3927.32 11426.02,3738.35 11347.28,3659.61 11287.24,3659.61
QE: D6.1 LEDE.2 Q3.2 RL3.4 | length 1581.8
  Top Layer w19.68: D6.1 11276.42,3023.58 ; Q3.2 11232.13,2915.51 11276.42,2959.8 11276.42,3023.58 ; RL3.4@12028.11,3187.56 11864.13,3023.58 11276.42,3023.58
  Bottom Layer w19.68: RL3.4@12028.11,3187.56 12313.11,3187.56 LEDE.2@12318.11,3182.56
QM: D10.1 HD6.2 LEDVan.2 Q5.2 | length 1589.7
  Top Layer w47.24: Q5.2 11554.96,2503.11 11513.62,2461.77 11513.62,2346.61 11594.33,2265.91 11940.91,2265.91 ; D10.1 11940.91,2265.91 ; HD6.2 12106.81,2100 11940.91,2265.91
  Bottom Layer w19.68: D10.1 12159.76,2395.24 LEDVan.2
RX: "rx tx -.3" PIC18F26K20.18 | length 533.7
  Top Layer w19.68: PIC18F26K20.18 10325.63,3419.76 10325.63,3537.56 10385.67,3597.6 10385.67,3884.33 10355,3915
TX: "rx tx -.2" PIC18F26K20.17 | length 536
  Top Layer w19.68: PIC18F26K20.17 10375,3520.98 10463.43,3609.41 10463.43,3906.57 10455,3915
VANA: +.1@9535,3390 PIC18F26K20.3 | length 933.8
  Top Layer w19.68: +.1@9535,3390 9678.9,3390 9723.27,3345.63 9723.27,2963.74 9764.61,2922.4 9904.41,2922.4 9925,2942.99 PIC18F26K20.3
VANB: +.1@9540,2720 PIC18F26K20.4 | length 649.4
  Top Layer w19.68: +.1@9540,2720 9599.61,2720 9760.67,2881.06 9920.12,2881.06 9975,2935.94 PIC18F26K20.4
VANC: +.1@9540,2070 PIC18F26K20.5 | length 1381.1
  Top Layer w19.68: +.1@9540,2070 9542.91,2067.09 9611.06,2067.09 9631.73,2087.76 9631.73,2677.32 9674.06,2719.65 9919.13,2719.65 9999.53,2800.04 9999.53,2897.52 10025,2922.99 PIC18F26K20.5
VAND: +.1@10740,3574.96 PIC18F26K20.6 | length 1070.9
  Top Layer w19.68: PIC18F26K20.6 10075,3179.65 10122.87,3227.52 10524.45,3227.52 10618.94,3322.01 10618.94,3532.64 10661.26,3574.96 +.1@10740,3574.96
VANE: +.1@10738.03,2968.66 PIC18F26K20.7 | length 787.9
  Top Layer w19.68: PIC18F26K20.7 10125,3129.25 10173.27,3177.52 10496.69,3177.52 10705.55,2968.66 +.1@10738.03,2968.66
VPP: "p + - d c.1" PIC18F26K20.1 R5.1 sw.2 | length 1007.4
  Top Layer w19.68: sw.2 9798.66,3576.65 9779.53,3557.52 9779.53,3363.19 9825,3317.72 PIC18F26K20.1
  Bottom Layer w19.68: 9730,3870 9730,3727.87 9828.78,3629.09 9909.29,3629.09 R5.1
pads on no net: 7805.4 Designator6.1 Designator6.4 Designator7.1 Designator7.4 LEDDC1.VIT1 LEDDC2.VIT1 LEDDC3.VIT1 lm117.4 PIC18F26K20.11 PIC18F26K20.12 PIC18F26K20.13 PIC18F26K20.14 PIC18F26K20.15 PIC18F26K20.16 PIC18F26K20.21 PIC18F26K20.22 PIC18F26K20.23 PIC18F26K20.24 PIC18F26K20.25 PIC18F26K20.26

## Polygon pours and split planes (outlines as drawn)
GND on Bottom Layer "Top Layer-No Net" (solid, pour order 6): 7750,4450 13000,4450 13000,1450 7750,1450
no net on Bottom Layer "Top Layer-No Net" (solid, pour order 8): 13250,1450 13250,4450 15300,4450 15300,1450
GND on Top Layer "Top Layer-No Net" (solid, pour order 5): 7750,4450 13000,4450 13000,1450 7750,1450
no net on Top Layer "Top Layer-No Net" (solid, pour order 7): 13250,1450 13250,4450 15300,4450 15300,1450